# Altium PCB DisplayPCB.PcbDoc (part 1 of 2)
Units mil, origin at the board's own origin, x right, y up, seen from the top; angles counter-clockwise.
Board outline 3900 x 3000 mil, 2 copper layers (Top Layer, Bottom Layer); 68 components, 81 nets, 271 pads, 0 vias.
Unrouted connection lines stored in the file: 162.
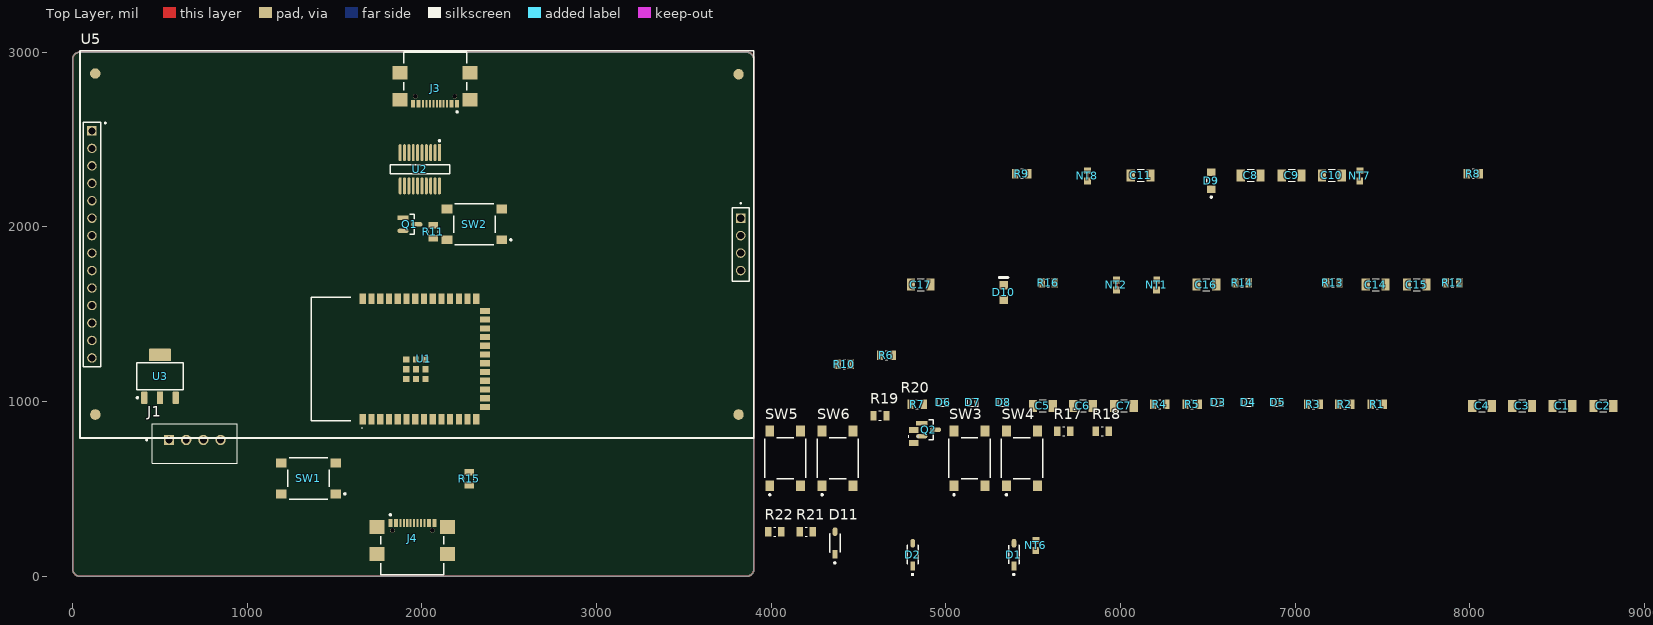
[diagram p0: Top Layer view]
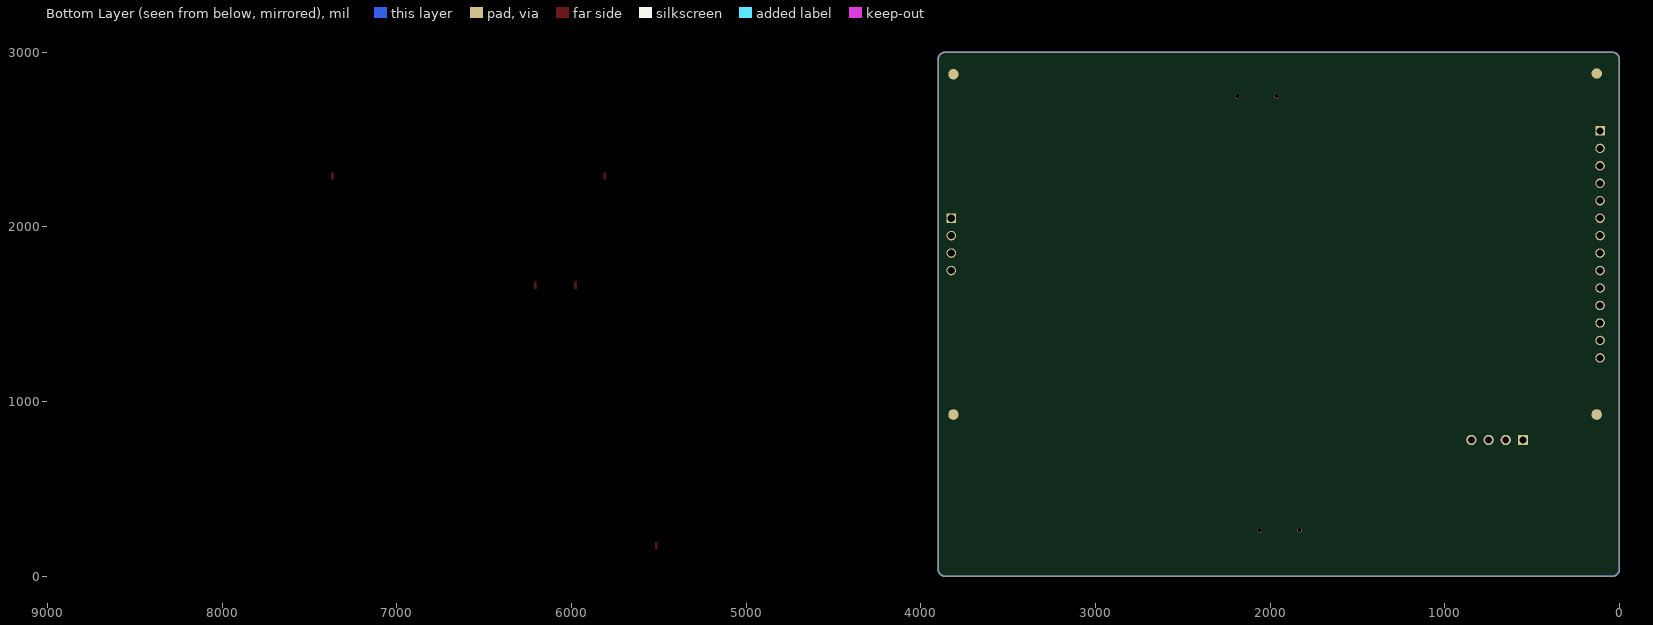
[diagram p1: Bottom Layer view, seen from below]

## Layer stack, top to bottom
Top Solder: solder mask 0.4, Solder Resist, Dk 3.5
Top Layer: signal copper 1.4
Dielectric 1: dielectric 12.6, FR-4, Dk 4.8
Bottom Layer: signal copper 1.4
Bottom Solder: solder mask 0.4, Solder Resist, Dk 3.5

## Board outline
0,40 0,2960 cw(c40,2960) 40,3000 3860,3000 cw(c3860,2960) 3900,2960 3900,40 cw(c3860,40) 3860,0 40,0 cw(c40,40)

## Design rules (kind name [scope] priority, off if disabled: settings)
Clearance [All] p1: gap=10 ignorepadtopadclearanceinfootprint=FALSE
PolygonConnect [All] p1: connectstyle=Relief reliefconductorwidth=10 reliefentries=4 polygonreliefangle="90 Angle" airgapwidth=10
RoutingVias [All] p1: holewidth=28 width=50 viastyle="Through Hole" minholewidth=28 minwidth=50 maxholewidth=28 maxwidth=50
SolderMaskExpansion [All] p1: expansion=4 istentingtop=FALSE
SupplyNets "Schematic Supply Nets_5" [InNet('+VCC')] p1: voltage=0.000
SupplyNets "Schematic Supply Nets_4" [InNet('+5V_VBUS2')] p2: voltage=0.000
SupplyNets "Schematic Supply Nets_3" [InNet('+3V3')] p3: voltage=0.000
SupplyNets "Schematic Supply Nets_1" [InNet('+5V_VBUS1')] p4: voltage=0.000
SupplyNets "Schematic Supply Nets" [InNet('GND')] p5: voltage=0.000
Width [All] p1: maxlimit=10 minlimit=10 preferedwidth=10
30 further rules are at their usual default settings.

## Classes and differential pairs
component class U_Peripherals: R17 R18 R19 R20 SW3 SW4 SW5 SW6 U5

## Components (designator, comment, footprint, x,y, rotation, side; value= is the part's Value field where it differs from the comment)
C1 "100 nF, 50 V" 1206_CAP 8529.68,975 r0 top value=100nF
C2 "4u7, 16V" 1206_CAP 8764.68,975 r0 top value=4.7uF
C3 "10uF, 25 V" 1206_CAP 8299.68,975 r0 top value=10uF
C4 "10uF, 25 V" 1206_CAP 8069.69,975 r0 top value=10uF
C5 "100 nF, 50 V" 1206_CAP 5554.69,975 r0 top value=100nF
C6 "100 nF, 50 V" 1206_CAP 5784.69,975 r0 top value=100nF
C7 "100 nF, 50 V" 1206_CAP 6019.69,975 r0 top value=100nF
C8 "4u7, 16V" 1206_CAP 6744.69,2295 r0 top value=4.7uF
C9 "10uF, 25 V" 1206_CAP 6979.69,2295 r0 top value=10uF
C10 "10uF, 25 V" 1206_CAP 7209.69,2295 r0 top value=10uF
C11 "10uF, 25 V" 1206_CAP 6114.69,2295 r0 top value=10uF
C14 "10uF, 25 V" 1206_CAP 7460.94,1670 r0 top value=10uF
C15 "100 nF, 50 V" 1206_CAP 7695.94,1670 r0 top value=100nF
C16 "1uF, 16 V" 1206_CAP 6490.94,1670 r0 top
C17 "100 nF, 50 V" 1206_CAP 4855.94,1670 r0 top value=100nF
D1 "1N5819HW-7-F" FP-SOD123-IPC_B 5389.69,123.8 r90 top
D2 "1N5819HW-7-F" FP-SOD123-IPC_B 4809.69,123.8 r90 top
D3 "AQ3045-01ETG" SOD882 6559.69,995 r0 top
D4 "AQ3045-01ETG" SOD882 6729.69,995 r0 top
D5 "AQ3045-01ETG" SOD882 6899.69,995 r0 top
D6 "AQ3045-01ETG" SOD882 4984.69,995 r0 top
D7 "AQ3045-01ETG" SOD882 5154.69,995 r0 top
D8 "AQ3045-01ETG" SOD882 5329.69,995 r0 top
D9 "Green LED" FP-LTST-C171KGKT-MFG 6519.69,2265 r90 top
D10 "RED LED" LTST-C170KRKT_V 5330.94,1625 r90 top
D11 "1N5819HW-7-F" FP-SOD123-IPC_B 4365,190 r90 top
J1 "B4B-XH-A" JST_B4B-XH-A(LF)(SN) 699.21,759.33 r180 top
J3 "USB4110-GF-A" FP-USB4110-GF-A-MFG 2075,2850 r180 top
J4 "USB4110-GF-A" FP-USB4110-GF-A-MFG 1945,160 r0 top
NT1 "NT" NetTie_SMD 6205.94,1670 r90 top net-tie
NT2 "NT" NetTie_SMD 5975.94,1670 r90 top net-tie
NT6 "NT" NetTie_SMD 5514.69,178.8 r90 top net-tie
NT7 "NT" NetTie_SMD 7369.69,2295 r90 top net-tie
NT8 "NT" NetTie_SMD 5809.69,2295 r90 top net-tie
Q1 "SS8050-G" FP-SS8050-G-IPC_A 1930.61,2015 r0 top
Q2 "SS8050-G" FP-SS8050-G-IPC_A 4900.94,838.8 r0 top
R1 "27R" 0805_Resistor 7469.69,985 r0 top value=27.4R
R2 "27R" 0805_Resistor 7284.69,985 r0 top value=27.4R
R3 "0R" 0805_Resistor 7104.69,985 r0 top
R4 "5K1" 0805_Resistor 6224.69,985 r0 top value=5.1kR
R5 "5K1" 0805_Resistor 6409.69,985 r0 top value=5.1kR
R6 "5K1" 0805_Resistor 4659.69,1265 r0 top value=5.1kR
R7 "5K1" 0805_Resistor 4834.69,985 r0 top value=5.1kR
R8 "5K1" 0805_Resistor 8019.69,2305 r0 top value=5.1kR
R9 "10k (1%)" 0805_Resistor 5434.69,2305 r0 top
R10 "10k (1%)" 0805_Resistor 4417.4,1215 r0 top
R11 "0R" 0805_Resistor 2065,1972.4 r90 top
R12 "0R" 0805_Resistor 7900.94,1680 r0 top
R13 "10k (1%)" 0805_Resistor 7215.94,1680 r0 top
R14 "1K" 0805_Resistor 6695.94,1680 r0 top value=1kR
R15 "0R" 0805_Resistor 2270,557.4 r90 top
R16 "0R" 0805_Resistor 5585.94,1680 r0 top
R17 "10k (1%)" 0805_Resistor 5675,830 r0 top
R18 "10k (1%)" 0805_Resistor 5895,830 r0 top
R19 "10k (1%)" 0805_Resistor 4622.6,920 r0 top
R20 "10k (1%)" 0805_Resistor 4815,800 r90 top
R21 "1K" 0805_Resistor 4200,255 r0 top value=1kR
R22 "2k" 0805_Resistor 4020,255 r0 top value=2kR
SW1 "PTS645SH50SMTR92 LFS" FP-PTS645SH50SMTR92LFS-MFG 1350,560 r180 top
SW2 "PTS645SH50SMTR92 LFS" FP-PTS645SH50SMTR92LFS-MFG 2300,2015 r180 top
SW3 "PTS645SH50SMTR92 LFS" FP-PTS645SH50SMTR92LFS-MFG 5135,675 r90 top
SW4 "PTS645SH50SMTR92 LFS" FP-PTS645SH50SMTR92LFS-MFG 5435,675 r90 top
SW5 "PTS645SH50SMTR92 LFS" FP-PTS645SH50SMTR92LFS-MFG 4080,675 r90 top
SW6 "PTS645SH50SMTR92 LFS" FP-PTS645SH50SMTR92LFS-MFG 4380,675 r90 top
U1 "ESP32-S3-WROOM-1(N16R8)" ESP32S3WROOM1N8R2 1868.27,1244.17 r90 top
U2 "FT231XS-R" FP-SSOP-20-IPC_A 1987.5,2330.01 r270 top
U3 "TL1963A-33DCYR" DCY0004A_N 500,1145 r90 top
U5 "TFT_SPI_SCREEN" TFT_SCREEN 42,791 r0 top

## Footprints (in the part's own frame and the unit in brackets; to place one, negate y for a bottom-side part, rotate by r counter-clockwise, add the part's x,y. Pads: shape width x height; smd on the part's side, far side on the other; paste and mask are expansions set on the pad)
0805_Resistor [mm]
  rect 0.92x1.38 smd: 1(-0.955,0) 2(0.955,0)
  silkscreen extent -0.17,-0.68 0.17,0.68, body extent -1,-0.63 1,0.63, height 0.6
1206_CAP [mm]
  rect 1.21x1.77 smd: 1(-1.428,0) 2(1.428,0)
  silkscreen extent -0.5,-0.88 0.5,0.88, body extent -1.6,-0.72 1.6,0.88, height 1.8
DCY0004A_N [mm] "SOT223, 4-Leads, Body 6.7x3.7mm, Pitch 2.3mm, IPC Medium Density"
  rrect11% 1.75x0.9 smd: 1(-3.125,2.3) 2(-3.125,0) 3(-3.125,-2.3)
  rrect6% 1.75x3.2 smd: 4(3.125,0)
  silkscreen extent -3.25,-3.35 1.95,3.42, body extent -3.5,-3.25 3.5,3.25, height 1.62
ESP32S3WROOM1N8R2 [mm]
  rect 1.5x0.9 smd: 1(-8.75,5.26) 2(-8.75,3.99) 3(-8.75,2.72) 4(-8.75,1.45) 5(-8.75,0.18) 6(-8.75,-1.09) 7(-8.75,-2.36) 8(-8.75,-3.63) 9(-8.75,-4.9) 10(-8.75,-6.17) 11(-8.75,-7.44) 12(-8.75,-8.71) 13(-8.75,-9.98) 14(-8.75,-11.25) 27(8.75,-11.25) 28(8.75,-9.98) 29(8.75,-8.71) 30(8.75,-7.44) 31(8.75,-6.17) 32(8.75,-4.9) 33(8.75,-3.63) 34(8.75,-2.36) 35(8.75,-1.09) 36(8.75,0.18) 37(8.75,1.45) 38(8.75,2.72) 39(8.75,3.99) 40(8.75,5.26)
  rect 0.9x1.5 smd: 15(-6.985,-12.5) 16(-5.715,-12.5) 17(-4.445,-12.5) 18(-3.175,-12.5) 19(-1.905,-12.5) 20(-0.635,-12.5) 21(0.635,-12.5) 22(1.905,-12.5) 23(3.175,-12.5) 24(4.445,-12.5) 25(5.715,-12.5) 26(6.985,-12.5)
  rect 0.9x0.9 smd: 41(-1.5,-2.46) 42(-1.5,-1.06) 43(-2.9,-1.06) 44(-2.9,-2.46) 45(-2.9,-3.86) 46(-1.5,-3.86) 47(-0.1,-3.86) 48(-0.1,-2.46) 49(-0.1,-1.06)
  silkscreen extent -10.1,5.35 9,12.75, body extent -9,-12.75 9,12.75, height 3.25
FP-LTST-C171KGKT-MFG [mm]
  rect 1.1x1.25 smd paste+0 mask+0: 1(-1.25,0) 2(1.25,0)
  silkscreen extent -2.52,-0.67 0.33,0.67, body extent -1.9,-0.77 1.9,0.77, height 0.25
FP-PTS645SH50SMTR92LFS-MFG [mm]
  rect 1.55x1.3 smd paste+0 mask+0: 1(-3.975,2.25) 2(3.975,2.25) 3(-3.975,-2.25) 4(3.975,-2.25)
  silkscreen extent -5.43,-3 3,3, body extent -4.5,-3 4.5,3, height 4.3
FP-SOD123-IPC_B [mil]
  rect 49.51x27.66 smd paste+0 mask+0: 1(-64.98,0)
  rrect100% 49.51x27.66 smd paste+0 mask+0: 2(64.98,0)
  silkscreen extent -119,-31 52,31, body extent -100,-40 100,40, height 10
FP-SS8050-G-IPC_A [mm]
  rect 1.657x0.612 smd paste+0 mask+0: 1(-1.001,0.95)
  rrect100% 1.657x0.612 smd paste+0 mask+0: 2(-1.001,-0.95) 3(1.001,0)
  silkscreen extent 0,-1.45 0.65,1.45, body extent -2.33,-1.95 2.33,1.95, height 0.25
FP-SSOP-20-IPC_A [mil]
  rect 97.53x16.81 smd paste+0 mask+0: 1(-95.01,112.5)
  rrect100% 97.53x16.81 smd paste+0 mask+0: 2(-95.01,87.5) 3(-95.01,62.5) 4(-95.01,37.5) 5(-95.01,12.5) 6(-95.01,-12.5) 7(-95.01,-37.5) 8(-95.01,-62.5) 9(-95.01,-87.5) 10(-95.01,-112.5) 11(95.01,-112.5) 12(95.01,-87.5) 13(95.01,-62.5) 14(95.01,-37.5) 15(95.01,-12.5) 16(95.01,12.5) 17(95.01,37.5) 18(95.01,62.5) 19(95.01,87.5) 20(95.01,112.5)
  silkscreen extent -168,-170 27,170, body extent -163,-190 163,190, height 10
FP-USB4110-GF-A-MFG [mm]
  rect 2.18x2 smd paste+0 mask+0: 1(-5.11,3.105) 2(5.11,3.105) 3(-5.11,-0.825) 4(5.11,-0.825)
  rect 0.6x1.15 smd paste+0 mask+0: A1-B12(-3.2,3.68) A4-B9(-2.4,3.68) B1-A12(3.2,3.68) B4-A9(2.4,3.68)
  rect 0.3x1.15 smd paste+0 mask+0: A5(-1.25,3.68) A6(-0.25,3.68) A7(0.25,3.68) A8(1.25,3.68) B5(1.75,3.68) B6(0.75,3.68) B7(-0.75,3.68) B8(-1.75,3.68)
  round 0.65 hole 0.65 unplated paste-2539.97 mask+0: ""(-2.89,2.605) ""(2.89,2.605)
  silkscreen extent -4.57,-3.83 4.57,4.99, body extent -6.3,-3.92 6.3,4.36, height 0.25
JST_B4B-XH-A(LF)(SN) [mm]
  rect 1.508x1.508 / inner round 1.508 / far side rect 1.508x1.508 hole 1: 1(3.75,-0.525)
  round 1.508 hole 1: 2(1.25,-0.525) 3(-1.25,-0.525) 4(-3.75,-0.525)
  silkscreen extent -6.2,-2.88 7.1,2.88, body extent -6.2,-2.88 6.2,2.88, height 3.4
LTST-C170KRKT_V [mm] "SMD, 2-Leads, Body 2x1.25mm"
  rect 1.2x1.2 smd: 1(-1.05,0) 2(1.05,0)
  silkscreen extent -0.05,-0.63 2.16,0.64, body extent -1.01,-0.63 1.01,0.63, height 1.1
NetTie_SMD [mm]
  rect 1x1 smd mask-10: 1(-0.813,0) 2(0.686,-0.025)
  Top Layer region: -0.609,-0.203 0.458,-0.203 0.458,0.178 -0.609,0.178
SOD882 [mm]
  rect 0.35x0.6 smd: 1(-0.325,0) 2(0.325,0)
  silkscreen extent -0.79,-0.58 0.79,0.58, body extent -0.54,-0.34 0.54,0.34, height 0.42
TFT_SCREEN [mm] "3.5 TFT LCD"
  rect 1.37x1.37 hole 1.02: 01(1.727,44.679)
  round 1.37 hole 1.02: 02(1.727,42.139) 03(1.727,39.599) 04(1.727,37.059) 05(1.727,34.519) 06(1.727,31.979) 07(1.727,29.439) 08(1.727,26.899) 09(1.727,24.359) 10(1.727,21.819) 11(1.727,19.279) 12(1.727,16.739) 13(1.727,14.199) 14(1.727,11.659)
  oval 1.55x1.5 all layers, no hole: 3(2.22,53.02)
  oval 1.5x1.55 all layers, no hole: 6(2.22,3.42) 7(95.78,3.42) 8(95.78,52.92)
  rect 1.39x1.39 hole 1.04: 15(96.088,31.979)
  round 1.39 hole 1.04: 16(96.088,29.439) 17(96.088,26.899) 18(96.088,24.359)
  silkscreen extent 0,0 98,56.34, body extent 0,0 98,56.5, height 17.94

## Part data
C1 C5 C6 C7 C15 C17: library part 1206B104K500CT, "Ceramic Capacitor, Multilayer, Ceramic, 50V, 10% +Tol, 10% -Tol, X7R, 15% TC, 0.1uF, Surface Mount, 1206", Capacitor Type=Ceramic, Case/Package=1206, Manufacturer="Walsin Technologies", Max Operating Temperature=125°C, Min Operating Temperature=-55°C, Package Shape=Rectangular, Package Style=SMTMeter, Rated DC Voltage (URdc)=50V, Supplier Part Number=1292-1605-1-ND, Temperature Characteristics Code=X7R, Tolerance  (fill in as +-)=10%, Category="Ceramic Capacitors", ComponentLink1Description=https://datasheet.ciiva.com:443/pdfs/VipMasterIC/IC/WATC/WATC-S-A0009550342/WATC-S-A0009550342-1.pdf?src-supplier=IHS+Markit, ComponentLink1URL=https://datasheet.ciiva.com:443/pdfs/VipMasterIC/IC/WATC/WATC-S-A0009550342/WATC-S-A0009550342-1.pdf?src-supplier=IHS+Markit, ComponentLink2Description=http://www.farnell.com/datasheets/2340522.pdf?src-supplier=Farnell, ComponentLink2URL=http://www.farnell.com/datasheets/2340522.pdf?src-supplier=Farnell, ComponentLink3Description=http://www.farnell.com/datasheets/2340522.pdf?src-supplier=Newark, ComponentLink3URL=http://www.farnell.com/datasheets/2340522.pdf?src-supplier=Newark, ComponentLink4Description=http://www.passivecomponent.com/wp-content/uploads/2018/10/MLCC.pdf?src-supplier=Digikey, ComponentLink4URL=http://www.passivecomponent.com/wp-content/uploads/2018/10/MLCC.pdf?src-supplier=Digikey, ComponentLink5Description=https://datasheet.octopart.com/1206B104K500CT-Walsin-Technologies-datasheet-85392065.pdf?src-supplier=Element14, ComponentLink5URL=https://datasheet.octopart.com/1206B104K500CT-Walsin-Technologies-datasheet-85392065.pdf?src-supplier=Element14, ComponentLink6Description=http://www.farnell.com/datasheets/1958513.pdf?src-supplier=Element14, ComponentLink6URL=http://www.farnell.com/datasheets/1958513.pdf?src-supplier=Element14, ComponentLink7Description=http://www.farnell.com/datasheets/2340522.pdf?src-supplier=Element14, ComponentLink7URL=http://www.farnell.com/datasheets/2340522.pdf?src-supplier=Element14, ComponentLink8Description=https://www.verical.com/server-webapp/html/getDatasheet?partID=71573&src-supplier=Verical, ComponentLink8URL=https://www.verical.com/server-webapp/html/getDatasheet?partID=71573&src-supplier=Verical, ComponentLink9Description=https://datasheet.octopart.com/1206B104K500CT-Walsin-Technologies-datasheet-128065749.pdf?src-supplier=Future+Electronics, ComponentLink9URL=https://datasheet.octopart.com/1206B104K500CT-Walsin-Technologies-datasheet-128065749.pdf?src-supplier=Future+Electronics, ComponentLink10Description=https://datasheet.octopart.com/1206B104K500CT-Walsin-Technologies-datasheet-62066062.pdf?src-supplier=TME, ComponentLink10URL=https://datasheet.octopart.com/1206B104K500CT-Walsin-Technologies-datasheet-62066062.pdf?src-supplier=TME, Dielectric Material=Ceramic, Height=0.8mm, JESD-609 Code=e3, Length=3.2mm, Manufacturer Part Number=1206B104K500CT, Mounting Technology="Surface Mount", Multilayer=Yes, Packaging="Tape and Reel", Pins=2, Pricing="1=0.11, 10=0.061, 100=0.0383, 1000=0.02628 (USD)", Reach SVHC Compliant=Yes, RoHS=Yes, RoHS Compliant=Yes, Stock=1578618, Supplier=Digikey, Terminal Finish=Nickel, Termination=Wraparound, Tolerance (fill in as +-)=10%, Width=1.6mm
C2 C8: library part CL31B475KOHNNNE, "CAP CER 4.7UF 16V X7R 1206", Capacitor Type=Ceramic, Case/Package=1206, Manufacturer=Samsung, Max Operating Temperature=125°C, Min Operating Temperature=-55°C, Package Shape=Rectangular, Package Style=SMTMeter, Rated DC Voltage (URdc)=16V, Supplier Part Number=1276-3182-1-ND, Temperature Characteristics Code=X7R, Tolerance  (fill in as +-)=10%, Category="Ceramic Capacitors", ComponentLink1Description=https://datasheet.ciiva.com:443/pdfs/VipMasterIC/IC/SEMS/SEMS-S-A0008522756/SEMS-S-A0008522608-1.pdf?src-supplier=IHS+Markit, ComponentLink1URL=https://datasheet.ciiva.com:443/pdfs/VipMasterIC/IC/SEMS/SEMS-S-A0008522756/SEMS-S-A0008522608-1.pdf?src-supplier=IHS+Markit, ComponentLink2Description=https://datasheet.ciiva.com/15196/getdatasheetpartid-358695-15196064.pdf?src-supplier=Verical, ComponentLink2URL=https://datasheet.ciiva.com/15196/getdatasheetpartid-358695-15196064.pdf?src-supplier=Verical, Dielectric Material=Ceramic, Height=1.8mm, JESD-609 Code=e3, Length=3.2mm, Manufacturer Part Number=CL31B475KOHNNNE, Mounting Technology="Surface Mount", Multilayer=Yes, Packaging="Tape and Reel", Pins=2, Pricing="1=0.18, 10=0.103, 100=0.0669, 1000=0.04704 (USD)", Reach SVHC Compliant=Yes, RoHS=Yes, RoHS Compliant=Yes, Stock=236847, Supplier=Digikey, Terminal Finish=Nickel, Termination=Wraparound, Tolerance (fill in as +-)=10%, Width=1.6mm
C3 C4 C9 C10 C11 C14: library part TMK316BJ106KL-T, "Ceramic Capacitor, Multilayer, Ceramic, 25V, 10% +Tol, 10% -Tol, X5R, 15% TC, 10uF, Surface Mount, 1206", Capacitor Type=Ceramic, Case/Package=1206, Manufacturer="Taiyo Yuden", Max Operating Temperature=85°C, Min Operating Temperature=-55°C, Package Shape=Rectangular, Package Style=SMTMeter, Rated DC Voltage (URdc)=25V, Supplier Part Number=587-1337-1-ND, Temperature Characteristics Code=X5R, Tolerance  (fill in as +-)=10%, Category="Ceramic Capacitors", ComponentLink1Description=https://datasheet.ciiva.com:443/pdfs/VipMasterIC/IC/TAIY/TAIY-S-A0007939172/TAIY-S-A0007939042-1.pdf?src-supplier=IHS+Markit, ComponentLink1URL=https://datasheet.ciiva.com:443/pdfs/VipMasterIC/IC/TAIY/TAIY-S-A0007939172/TAIY-S-A0007939042-1.pdf?src-supplier=IHS+Markit, ComponentLink2Description=https://datasheet.ciiva.com/7975/1734574-7975841.pdf?src-supplier=Element14, ComponentLink2URL=https://datasheet.ciiva.com/7975/1734574-7975841.pdf?src-supplier=Element14, ComponentLink3Description=https://datasheet.ciiva.com/26936/getdatasheetpartid-782930-26936474.pdf?src-supplier=Verical, ComponentLink3URL=https://datasheet.ciiva.com/26936/getdatasheetpartid-782930-26936474.pdf?src-supplier=Verical, ComponentLink4Description=https://datasheet.ciiva.com/30053/584tmk316bj106kl-t-30053522.pdf?src-supplier=Onlinecomponents.com, ComponentLink4URL=https://datasheet.ciiva.com/30053/584tmk316bj106kl-t-30053522.pdf?src-supplier=Onlinecomponents.com, ComponentLink5Description=https://datasheet.ciiva.com/11601/tmk316bj106kl-t-ss-11601880.pdf?src-supplier=Avnet, ComponentLink5URL=https://datasheet.ciiva.com/11601/tmk316bj106kl-t-ss-11601880.pdf?src-supplier=Avnet, ComponentLink6Description=https://datasheet.ciiva.com/15922/1116tmk316bj106kl-t-15922414.pdf?src-supplier=Onlinecomponents.com, ComponentLink6URL=https://datasheet.ciiva.com/15922/1116tmk316bj106kl-t-15922414.pdf?src-supplier=Onlinecomponents.com, ComponentLink7Description=https://datasheet.ciiva.com/5420/mlcc-all-e-541559-5420143.pdf?src-supplier=Mouser, ComponentLink7URL=https://datasheet.ciiva.com/5420/mlcc-all-e-541559-5420143.pdf?src-supplier=Mouser, Dielectric Material=Ceramic, Height=1.6mm, JESD-609 Code=e3, Length=3.2mm, Manufacturer Part Number=TMK316BJ106KL-T, Mounting Technology="Surface Mount", Multilayer=Yes, Packaging="Tape and Reel", Pins=2, Pricing="1=0.12, 10=0.046, 100=0.04, 1000=0.03425 (USD)", Reach SVHC Compliant=Yes, RoHS=Yes, RoHS Compliant=Yes, Stock=22102, Supplier=Digikey, Terminal Finish=Nickel, Termination=Wraparound, Tolerance (fill in as +-)=10%, Width=1.6mm
C16: library part CL31B105KOFNNNE, "Ceramic Capacitor, Multilayer, Ceramic, 16V, 10% +Tol, 10% -Tol, X7R, 15% TC, 1uF, Surface Mount, 1206", Capacitance=1uF, Capacitor Type=Ceramic, Manufacturer 1=Samsung, Max Operating Temperature=125°C, Min Operating Temperature=-55°C, Negative Tolerance=10%, Package Shape=Rectangular, Package Style=SMTMeter, Rated DC Voltage (URdc)=16V, Temperature Characteristics Code=X7R, Category="Ceramic Capacitors", ComponentLink1Description=https://datasheet.ciiva.com:443/pdfs/VipMasterIC/IC/SEMS/SEMS-S-A0008524868/SEMS-S-A0008524880-1.pdf?src-supplier=IHS+Markit, ComponentLink1URL=https://datasheet.ciiva.com:443/pdfs/VipMasterIC/IC/SEMS/SEMS-S-A0008524868/SEMS-S-A0008524880-1.pdf?src-supplier=IHS+Markit, ComponentLink2Description=https://datasheet.ciiva.com/25798/cl31b105kofnnne-25798673.pdf?src-supplier=Digikey, ComponentLink2URL=https://datasheet.ciiva.com/25798/cl31b105kofnnne-25798673.pdf?src-supplier=Digikey, ComponentLink3Description=https://datasheet.ciiva.com/26838/getdatasheetpartid-358370-26838906.pdf?src-supplier=Verical, ComponentLink3URL=https://datasheet.ciiva.com/26838/getdatasheetpartid-358370-26838906.pdf?src-supplier=Verical, ComponentLink4Description=https://datasheet.ciiva.com/29200/453334-da-01-en-vs-kondensator-1206-29200316.pdf?src-supplier=Conrad, ComponentLink4URL=https://datasheet.ciiva.com/29200/453334-da-01-en-vs-kondensator-1206-29200316.pdf?src-supplier=Conrad, ComponentLink5Description=https://datasheet.ciiva.com/26310/mlcc-catalogdownload2013-eng-26310089.pdf?src-supplier=Distrelec, ComponentLink5URL=https://datasheet.ciiva.com/26310/mlcc-catalogdownload2013-eng-26310089.pdf?src-supplier=Distrelec, Dielectric Material=Ceramic, Height=1.25mm, JESD-609 Code=e3, Length=3.2mm, Manufacturer Part Number 1=CL31B105KOFNNNE, Mount="Surface Mount", Multilayer=Yes, Number of Pins=2, Packaging="Tape and Reel", Positive Tolerance=10%, Pricing 1="1=0.11, 10=0.059, 100=0.037, 1000=0.02531 (USD)", Reach SVHC Compliant=Yes, RoHS=Yes, RoHS Compliant=Yes, Size Code=1206, Stock 1=16372, Supplier 1=Digikey, Terminal Finish=Nickel, Termination=Wraparound, Width=1.6mm
D1 D2 D11: "Rectifier Diode, Schottky, 1 Phase, 1 Element, 1A, 40V V(RRM), Silicon", Forward Voltage=320mV, Manufacturer=Diodes, Max Operating Temperature=125°C, Max Output current=1A, Max Power Dissipation=450mW, Min Operating Temperature=-65°C, Non-rep Pk Forward Current-Max=25A, Package Body Material=Plastic, Package Shape=Rectangular, Package Style="SMALL OUTLINEMeter", Peak Reflow Temperature (Cel)=260°C, Rep Pk Reverse Voltage-Max=40V, Supplier Part Number=1N5819HW-FDICT-ND, Time @ Peak Reflow Temperature-Max (s)=40s, Category="Rectifier Diodes", ComponentLink1Description=https://datasheet.ciiva.com:443/pdfs/VipMasterIC/IC/DIOD/DIOD-S-A0009689747/DIOD-S-A0009691035-1.pdf?src-supplier=IHS+Markit, ComponentLink1URL=https://datasheet.ciiva.com:443/pdfs/VipMasterIC/IC/DIOD/DIOD-S-A0009689747/DIOD-S-A0009691035-1.pdf?src-supplier=IHS+Markit, ComponentLink2Description=https://datasheet.ciiva.com/16303/ds30217-16303296.pdf?src-supplier=Future+Electronics, ComponentLink2URL=https://datasheet.ciiva.com/16303/ds30217-16303296.pdf?src-supplier=Future+Electronics, ComponentLink3Description=https://datasheet.ciiva.com/1177/ds30217-1177089.pdf?src-supplier=Element14, ComponentLink3URL=https://datasheet.ciiva.com/1177/ds30217-1177089.pdf?src-supplier=Element14, ComponentLink4Description=https://datasheet.ciiva.com/912/ds30217-912801.pdf?src-supplier=Digikey, ComponentLink4URL=https://datasheet.ciiva.com/912/ds30217-912801.pdf?src-supplier=Digikey, ComponentLink5Description=https://datasheet.ciiva.com/912/ds30217-912802.pdf?src-supplier=Digikey, ComponentLink5URL=https://datasheet.ciiva.com/912/ds30217-912802.pdf?src-supplier=Digikey, ComponentLink6Description=https://datasheet.ciiva.com/912/ds30217-912803.pdf?src-supplier=Digikey, ComponentLink6URL=https://datasheet.ciiva.com/912/ds30217-912803.pdf?src-supplier=Digikey, ComponentLink7Description=https://datasheet.ciiva.com/8303/ds30217-8303132.pdf?src-supplier=Avnet, ComponentLink7URL=https://datasheet.ciiva.com/8303/ds30217-8303132.pdf?src-supplier=Avnet, Diode Element Material=SILICON, Diode Type=RECTIFIER, JESD-30 Code=R-PDSO-G2, JESD-609 Code=e3, Manufacturer Part Number=1N5819HW-7-F, Moisture Sensitivity Level=1, Number of Elements=1, Pins=2, Pricing="1=0.25, 10=0.17, 100=0.1037, 500=0.09142, 1000=0.08553 (USD)", Qualification Status="Not Qualified", Reach SVHC Compliant=Yes, RoHS=Yes, RoHS Compliant=Yes, Stock=568095, Supplier=Digikey, Surface Mount=Yes, Technology=SCHOTTKY, Terminal Finish=Tin, Terminal Form="Gull Wing", Terminal Position=DUAL
D3 D4 D5 D6 D7 D8: "Trans Voltage Suppressor Diode, 40W, 5.3V V(RWM), Bidirectional, 1 Element, Silicon, MO-236 / TVS DIODE 5.3VWM 12VC SOD882", Manufacturer 1=Littelfuse, Max Breakdown Voltage=9V, Max Operating Temperature=150°C, Min Breakdown Voltage=6.8V, Min Operating Temperature=-55°C, Non-rep Peak Rev Power Dis-Max=40W, Package Body Material=Plastic, Package Shape=Rectangular, Package Style="CHIP CARRIERMeter", Rep Pk Reverse Voltage-Max=5.3V, Category="TVS Diodes", ComponentLink1Description=https://datasheet.ciiva.com:443/pdfs/VipMasterIC/IC/LFSI/LFSI-S-A0007892042/LFSI-S-A0007892042-1.pdf?src-supplier=IHS+Markit, ComponentLink1URL=https://datasheet.ciiva.com:443/pdfs/VipMasterIC/IC/LFSI/LFSI-S-A0007892042/LFSI-S-A0007892042-1.pdf?src-supplier=IHS+Markit, ComponentLink2Description=http://www.littelfuse.com/~/media/electronics/datasheets/tvs_diode_arrays/littelfuse_tvs_diode_array_aq3045_datasheet.pdf.pdf?src-supplier=Digikey, ComponentLink2URL=http://www.littelfuse.com/~/media/electronics/datasheets/tvs_diode_arrays/littelfuse_tvs_diode_array_aq3045_datasheet.pdf.pdf?src-supplier=Digikey, ComponentLink3Description=https://www.littelfuse.com/~/media/electronics/datasheets/tvs_diode_arrays/littelfuse_tvs_diode_array_aq3045_datasheet.pdf.pdf?src-supplier=Digikey, ComponentLink3URL=https://www.littelfuse.com/~/media/electronics/datasheets/tvs_diode_arrays/littelfuse_tvs_diode_array_aq3045_datasheet.pdf.pdf?src-supplier=Digikey, ComponentLink4Description=https://datasheet.octopart.com/AQ3045-01ETG-Littelfuse-datasheet-101609968.pdf?src-supplier=Farnell, ComponentLink4URL=https://datasheet.octopart.com/AQ3045-01ETG-Littelfuse-datasheet-101609968.pdf?src-supplier=Farnell, ComponentLink5Description=https://datasheet.octopart.com/AQ3045-01ETG-Littelfuse-datasheet-140480283.pdf?src-supplier=Future+Electronics, ComponentLink5URL=https://datasheet.octopart.com/AQ3045-01ETG-Littelfuse-datasheet-140480283.pdf?src-supplier=Future+Electronics, Diode Element Material=SILICON, Diode Type="TRANS VOLTAGE SUPPRESSOR", Manufacturer Part Number 1=AQ3045-01ETG, Number of Elements=1, Number of Pins=2, Polarity=Bidirectional, Pricing 1="1=0.46, 10=0.302, 100=0.141, 500=0.134, 1000=0.127, 2000=0.1255, 5000=0.124, 10000=0.111, 20000=0.10638 (USD)", Reach SVHC Compliant=Yes, Reference Standard=AEC-Q101, RoHS=Yes, RoHS Compliant=Yes, Stock 1=14379, Supplier 1=Digikey, Surface Mount=Yes, Technology=AVALANCHE, Terminal Form="No Lead", Terminal Position=BOTTOM
D9: library part LTST-C171KGKT, "Green 571nm LED Indication - Discrete 2V 0805 (2012 Metric)", Color=Green, Forward Current=30mA, Manufacturer="Vishay Lite-On", Max Operating Temperature=85°C, Min Operating Temperature=-55°C, Supplier Part Number=160-1426-1-ND, Channels=1, ComponentLink1Description=https://datasheet.ciiva.com:443/pdfs/VipMasterIC/IC/LITE/LITES11816/LITES11816-1.pdf?src-supplier=IHS+Markit, ComponentLink1URL=https://datasheet.ciiva.com:443/pdfs/VipMasterIC/IC/LITE/LITES11816/LITES11816-1.pdf?src-supplier=IHS+Markit, ComponentLink2Description=https://datasheet.ciiva.com/11774/0900766b80dc0298-11774377.pdf?src-supplier=Rs, ComponentLink2URL=https://datasheet.ciiva.com/11774/0900766b80dc0298-11774377.pdf?src-supplier=Rs, ComponentLink3Description=https://datasheet.ciiva.com/12400/lite-on-ltst-c171kgkt-187692-12400799.pdf?src-supplier=Mouser, ComponentLink3URL=https://datasheet.ciiva.com/12400/lite-on-ltst-c171kgkt-187692-12400799.pdf?src-supplier=Mouser, ComponentLink4Description=https://datasheet.ciiva.com/16200/lite-on20ltst-c171kgkt-16200100.pdf?src-supplier=Future+Electronics, ComponentLink4URL=https://datasheet.ciiva.com/16200/lite-on20ltst-c171kgkt-16200100.pdf?src-supplier=Future+Electronics, ComponentLink5Description=https://datasheet.ciiva.com/15118/getdatasheetpartid-214542-15118099.pdf?src-supplier=Verical, ComponentLink5URL=https://datasheet.ciiva.com/15118/getdatasheetpartid-214542-15118099.pdf?src-supplier=Verical, ComponentLink6Description=https://datasheet.ciiva.com/2110/s-110-ltst-c171kgkt-2110072.pdf?src-supplier=Digikey, ComponentLink6URL=https://datasheet.ciiva.com/2110/s-110-ltst-c171kgkt-2110072.pdf?src-supplier=Digikey, ComponentLink7Description=https://datasheet.ciiva.com/2110/s-110-ltst-c171kgkt-2110073.pdf?src-supplier=Digikey, ComponentLink7URL=https://datasheet.ciiva.com/2110/s-110-ltst-c171kgkt-2110073.pdf?src-supplier=Digikey, ComponentLink8Description=https://datasheet.ciiva.com/2110/s-110-ltst-c171kgkt-2110074.pdf?src-supplier=Digikey, ComponentLink8URL=https://datasheet.ciiva.com/2110/s-110-ltst-c171kgkt-2110074.pdf?src-supplier=Digikey, JESD-609 Code=e3, Lens Style="WATER CLEAR", Luminous Intensity-Nom=35mcd, Manufacturer Part Number=LTST-C171KGKT, Mounting Technology="Surface Mount", Optoelectronic Device Type="SINGLE COLOR LED", Overall Height=0.8mm, Packaging="Tape and Reel", Pins=2, Pricing="1=0.15, 10=0.105, 100=0.0723, 500=0.05736, 1000=0.05238 (USD)", Reach SVHC Compliant=Yes, RoHS=Yes, RoHS Compliant=Yes, Shape=Rectangular, Size=1.4mm, Stock=117516, Supplier=Digikey, Terminal Finish=Tin, Terminal Pitch=2.5mm, Viewing Angle=130°
D10: library part LTST-C171KRKT, "Red 631nm LED Indication - Discrete 2V 0805 (2012 Metric)", Color=Red, Forward Current=30mA, Manufacturer="Vishay Lite-On", Max Operating Temperature=85°C, Min Operating Temperature=-55°C, Supplier Part Number=160-1427-1-ND, Supplier Part Number 1=160-1415-1-ND, Category=LEDs, Channels=1, ComponentLink1Description=https://datasheet.ciiva.com:443/pdfs/VipMasterIC/IC/LITE/LITES11817/LITES11817-1.pdf?src-supplier=IHS+Markit, ComponentLink1URL=https://datasheet.ciiva.com:443/pdfs/VipMasterIC/IC/LITE/LITES11817/LITES11817-1.pdf?src-supplier=IHS+Markit, ComponentLink2Description=https://datasheet.ciiva.com/11775/0900766b80dc0299-11775643.pdf?src-supplier=Rs, ComponentLink2URL=https://datasheet.ciiva.com/11775/0900766b80dc0299-11775643.pdf?src-supplier=Rs, ComponentLink3Description=https://datasheet.ciiva.com/12403/lite-on-ltst-c171krkt-187201-12403781.pdf?src-supplier=Mouser, ComponentLink3URL=https://datasheet.ciiva.com/12403/lite-on-ltst-c171krkt-187201-12403781.pdf?src-supplier=Mouser, ComponentLink4Description=https://datasheet.ciiva.com/16444/lite-on20ltst-c171krkt-16444779.pdf?src-supplier=Future+Electronics, ComponentLink4URL=https://datasheet.ciiva.com/16444/lite-on20ltst-c171krkt-16444779.pdf?src-supplier=Future+Electronics, ComponentLink5Description=https://datasheet.ciiva.com/2110/s-110-ltst-c171krkt-2110066.pdf?src-supplier=Digikey, ComponentLink5URL=https://datasheet.ciiva.com/2110/s-110-ltst-c171krkt-2110066.pdf?src-supplier=Digikey, ComponentLink6Description=https://datasheet.ciiva.com/2110/s-110-ltst-c171krkt-2110067.pdf?src-supplier=Digikey, ComponentLink6URL=https://datasheet.ciiva.com/2110/s-110-ltst-c171krkt-2110067.pdf?src-supplier=Digikey, ComponentLink7Description=https://datasheet.ciiva.com/2110/s-110-ltst-c171krkt-2110068.pdf?src-supplier=Digikey, ComponentLink7URL=https://datasheet.ciiva.com/2110/s-110-ltst-c171krkt-2110068.pdf?src-supplier=Digikey, JESD-609 Code=e3, Lens Style="WATER CLEAR", Luminous Intensity-Nom=54mcd, Manufacturer Part Number=LTST-C171KRKT, Mounting Technology="Surface Mount", Optoelectronic Device Type="SINGLE COLOR LED", Overall Height=0.8mm, Packaging="Tape and Reel", Pins=2, Pricing="1=0.15, 10=0.105, 100=0.0723, 500=0.05736, 1000=0.05238 (USD)", Reach SVHC Compliant=Yes, RoHS=Yes, RoHS Compliant=Yes, Shape=Rectangular, Size=1.4mm, Stock=198518, Supplier=Digikey, Supplier 1=Digikey, Terminal Finish=Tin, Terminal Pitch=2.5mm, Viewing Angle=130°
J1: library part 455-B4B-XH-A-ND, "CONN HEADER VERT 4POS 2.5MM", Manufacturer=JST, Manufacturer Part Number=S4B-PH-K-S, Supplier Part Number=455-1721-ND, Category="Headers and Wire Housings", ComponentLink1Description=https://media.digikey.com/pdf/Data%20Sheets/JST%20PDFs/PH%20Series.pdf?src-supplier=Digikey, ComponentLink1URL=https://media.digikey.com/pdf/Data%20Sheets/JST%20PDFs/PH%20Series.pdf?src-supplier=Digikey, Pricing="1=0.19, 10=0.158, 100=0.134, 500=0.1196, 1000=0.11389, 5000=0.10165, 10000=0.09679 (USD)", RoHS=Yes, Stock=152539, Supplier=Digikey, Supplier 1=Digikey, Supplier Part Number 1=455-B4B-XH-A-ND
J3 J4: "USB-C (USB TYPE-C) USB 2.0 Receptacle Connector 24 (16+8 Dummy) Position Surface Mount, Right Angle", Manufacturer 1="Global Connector Technology", Category="USB Connectors", ComponentLink1Description=https://datasheet.octopart.com/USB4110-GF-A-Global-Connector-Technology-datasheet-179886649.pdf?src-supplier=Future+Electronics, ComponentLink1URL=https://datasheet.octopart.com/USB4110-GF-A-Global-Connector-Technology-datasheet-179886649.pdf?src-supplier=Future+Electronics, ComponentLink2Description=https://gct.co/files/drawings/usb4110.pdf?src-supplier=Digikey, ComponentLink2URL=https://gct.co/files/drawings/usb4110.pdf?src-supplier=Digikey, ComponentLink3Description=https://datasheet.octopart.com/USB4110-GF-A-GCT-datasheet-166929324.pdf?src-supplier=SOS+electronic, ComponentLink3URL=https://datasheet.octopart.com/USB4110-GF-A-GCT-datasheet-166929324.pdf?src-supplier=SOS+electronic, ComponentLink4Description=https://datasheet.octopart.com/USB4110-GF-A-GCT-datasheet-166933377.pdf?src-supplier=TME, ComponentLink4URL=https://datasheet.octopart.com/USB4110-GF-A-GCT-datasheet-166933377.pdf?src-supplier=TME, Manufacturer Part Number 1=USB4110-GF-A, Pricing 1="1=1.24, 10=1.006, 25=0.9276, 50=0.8722, 100=0.8201, 250=0.75604, 500=0.71098 (USD)", RoHS=No, Stock 1=16644, Supplier 1=Digikey
NT1 NT2 NT6 NT7 NT8: library part NetTie_SMD, "Net TIE SMD"
Q1 Q2: "Bipolar (BJT) Transistor NPN 25 V 1.5 A 100MHz 300 mW Surface Mount SOT-23-3", Manufacturer=Comchip, Supplier Part Number=641-1790-1-ND, Category=Transistors, ComponentLink1Description=https://datasheet.ciiva.com:443/pdfs/VipMasterIC/IC/COMC/COMC-S-A0004994192/COMC-S-A0004994192-1.pdf?src-supplier=IHS+Markit, ComponentLink1URL=https://datasheet.ciiva.com:443/pdfs/VipMasterIC/IC/COMC/COMC-S-A0004994192/COMC-S-A0004994192-1.pdf?src-supplier=IHS+Markit, ComponentLink2Description="http://www.comchiptech.com/admin/files/product/SS8050-G RevA181526.pdf?src-supplier=Digikey", ComponentLink2URL="http://www.comchiptech.com/admin/files/product/SS8050-G RevA181526.pdf?src-supplier=Digikey", Manufacturer Part Number=SS8050-G, Pricing="1=0.24, 10=0.148, 100=0.0921, 500=0.06754, 1000=0.05958 (USD)", Reach SVHC Compliant=Yes, RoHS=Yes, RoHS Compliant=Yes, Stock=152644, Supplier=Digikey
R1 R2: library part CRCW080527R4FKEA, "RES SMD 27.4 OHM 1% 1/8W 0805", Case/Package=0805, Manufacturer=Vishay, Max Operating Temperature=155°C, Min Operating Temperature=-55°C, Package Height=0.45mm, Package Length=2mm, Package Shape=Rectangular, Package Width=1.25mm, Power=125mW, Rated Temperature=70°C, Resistor Type="FIXED RESISTOR", Supplier Part Number=541-27.4CCT-ND, Temperature Coefficient (ppm/Cel)=100, Tolerance=1%, Working Voltage=150V, Category="Chip SMD Resistors", ComponentLink1Description=https://datasheet.ciiva.com:443/pdfs/VipMasterIC/IC/VISH/VISH-S-A0007266705/VISH-S-A0007266705-1.pdf?src-supplier=IHS+Markit, ComponentLink1URL=https://datasheet.ciiva.com:443/pdfs/VipMasterIC/IC/VISH/VISH-S-A0007266705/VISH-S-A0007266705-1.pdf?src-supplier=IHS+Markit, ComponentLink2Description=https://datasheet.ciiva.com/11818/0900766b80d98b26-11818212.pdf?src-supplier=Rs, ComponentLink2URL=https://datasheet.ciiva.com/11818/0900766b80d98b26-11818212.pdf?src-supplier=Rs, ComponentLink3Description=https://datasheet.ciiva.com/22708/1697337-22708364.pdf?src-supplier=Element14, ComponentLink3URL=https://datasheet.ciiva.com/22708/1697337-22708364.pdf?src-supplier=Element14, ComponentLink4Description=https://datasheet.ciiva.com/2525/dcrcwe3-2525740.pdf?src-supplier=Digikey, ComponentLink4URL=https://datasheet.ciiva.com/2525/dcrcwe3-2525740.pdf?src-supplier=Digikey, ComponentLink5Description=https://datasheet.ciiva.com/2525/dcrcwe3-2525741.pdf?src-supplier=Digikey, ComponentLink5URL=https://datasheet.ciiva.com/2525/dcrcwe3-2525741.pdf?src-supplier=Digikey, ComponentLink6Description=https://datasheet.ciiva.com/2525/dcrcwe3-2525742.pdf?src-supplier=Digikey, ComponentLink6URL=https://datasheet.ciiva.com/2525/dcrcwe3-2525742.pdf?src-supplier=Digikey, ComponentLink7Description=https://datasheet.ciiva.com/5547/dcrcwe3-109170-5547413.pdf?src-supplier=Mouser, ComponentLink7URL=https://datasheet.ciiva.com/5547/dcrcwe3-109170-5547413.pdf?src-supplier=Mouser, ComponentLink8Description=https://datasheet.ciiva.com/7725/125364-7725886.pdf?src-supplier=Element14, ComponentLink8URL=https://datasheet.ciiva.com/7725/125364-7725886.pdf?src-supplier=Element14, ComponentLink9Description=https://datasheet.ciiva.com/7732/1697337-7732095.pdf?src-supplier=Element14, ComponentLink9URL=https://datasheet.ciiva.com/7732/1697337-7732095.pdf?src-supplier=Element14, ComponentLink10Description=https://datasheet.ciiva.com/16435/dcrcw-16435916.pdf?src-supplier=Future+Electronics, ComponentLink10URL=https://datasheet.ciiva.com/16435/dcrcw-16435916.pdf?src-supplier=Future+Electronics, Construction=Chip, JESD-609 Code=e3, Manufacturer Part Number=CRCW080527R4FKEA, Mounting Technology="Surface Mount", Packaging="Tape and Reel", Pins=2, Pricing="1=0.1, 10=0.039, 50=0.0248, 100=0.0208, 500=0.0143, 1000=0.01238 (USD)", Reach SVHC Compliant=Yes, Reference Standard=AEC-Q200, RoHS=Yes, RoHS Compliant=Yes, Stock=71015, Supplier=Digikey, Technology="METAL GLAZE/THICK FILM", Terminal Finish=Nickel, Termination=Wraparound
R3 R11 R12 R15 R16: library part CR0805AJ/-000EAS, "0 Ohms Jumper Chip Resistor 0805 (2012 Metric) Anti-Sulfur, Automotive AEC-Q200, Moisture Resistant Thick Film", Manufacturer=Bourns, Supplier Part Number=CR0805AJ/-000EASCT-ND, Category="Chip SMD Resistors", ComponentLink1Description=https://datasheet.ciiva.com:443/pdfs/VipMasterIC/IC/BOUR/BOUR-S-A0008933277/BOUR-S-A0008933277-1.pdf?src-supplier=IHS+Markit, ComponentLink1URL=https://datasheet.ciiva.com:443/pdfs/VipMasterIC/IC/BOUR/BOUR-S-A0008933277/BOUR-S-A0008933277-1.pdf?src-supplier=IHS+Markit, ComponentLink2Description=https://www.bourns.com/docs/product-datasheets/crxxxxa-as.pdf?src-supplier=Digikey, ComponentLink2URL=https://www.bourns.com/docs/product-datasheets/crxxxxa-as.pdf?src-supplier=Digikey, ComponentLink3Description=https://datasheet.octopart.com/CR0805AJ--000EAS-Bourns-datasheet-166097895.pdf?src-supplier=Electro+Sonic, ComponentLink3URL=https://datasheet.octopart.com/CR0805AJ--000EAS-Bourns-datasheet-166097895.pdf?src-supplier=Electro+Sonic, Manufacturer Part Number=CR0805AJ/-000EAS, Pricing="1=0.1, 10=0.034, 50=0.0212, 100=0.0177, 500=0.01208, 1000=0.01043 (USD)", RoHS=Yes, Stock=34544, Supplier=Digikey
R4 R5 R6 R7 R8: library part RC0805JR-075K1L, "RES 5.1K OHM 5% 1/8W 0805", Case/Package=0805, Manufacturer=Yageo, Max Operating Temperature=155°C, Min Operating Temperature=-55°C, Package Height=0.5mm, Package Length=2mm, Package Shape=Rectangular, Package Width=1.25mm, Power=125mW, Rated Temperature=70°C, Resistor Type="FIXED RESISTOR", Supplier Part Number=311-5.1KARCT-ND, Temperature Coefficient (ppm/Cel)=100, Tolerance=5%, Working Voltage=150V, Additional Feature="LASER TRIMMABLE", Category="Chip SMD Resistors", ComponentLink1Description=https://datasheet.ciiva.com:443/pdfs/VipMasterIC/IC/YAGO/YAGO-S-A0008145938/YAGO-S-A0008145938-1.pdf?src-supplier=IHS+Markit, ComponentLink1URL=https://datasheet.ciiva.com:443/pdfs/VipMasterIC/IC/YAGO/YAGO-S-A0008145938/YAGO-S-A0008145938-1.pdf?src-supplier=IHS+Markit, ComponentLink2Description=https://datasheet.ciiva.com/2456/pyu-r-int-thick-7-2456155.pdf?src-supplier=Digikey, ComponentLink2URL=https://datasheet.ciiva.com/2456/pyu-r-int-thick-7-2456155.pdf?src-supplier=Digikey, ComponentLink3Description=https://datasheet.ciiva.com/2456/pyu-r-int-thick-7-2456156.pdf?src-supplier=Digikey, ComponentLink3URL=https://datasheet.ciiva.com/2456/pyu-r-int-thick-7-2456156.pdf?src-supplier=Digikey, ComponentLink4Description=https://datasheet.ciiva.com/2456/pyu-r-int-thick-7-2456157.pdf?src-supplier=Digikey, ComponentLink4URL=https://datasheet.ciiva.com/2456/pyu-r-int-thick-7-2456157.pdf?src-supplier=Digikey, ComponentLink5Description=https://datasheet.ciiva.com/12577/rc0805-12577711.pdf?src-supplier=Mouser, ComponentLink5URL=https://datasheet.ciiva.com/12577/rc0805-12577711.pdf?src-supplier=Mouser, Construction=Chip, JESD-609 Code=e3, Manufacturer Part Number=RC0805JR-075K1L, Mounting Technology="Surface Mount", Packaging="Tape and Reel", Pins=2, Pricing="1=0.1, 10=0.008, 50=0.0072, 100=0.0061 (USD)", Reach SVHC Compliant=Yes, RoHS=Yes, RoHS Compliant=Yes, Stock=555886, Supplier=Digikey, Technology="METAL GLAZE/THICK FILM", Terminal Finish=Nickel, Termination=Wraparound
R9 R10 R13 R17 R18 R19 R20: library part RMCF0805FT10K0, "Fixed Resistor, Metal Glaze/thick Film, 0.125W, 10000ohm, 150V, 1% +/-Tol, 100ppm/Cel, Surface Mount, 0805", Manufacturer 1="Stackpole Electronics", Max Operating Temperature=155°C, Min Operating Temperature=-55°C, Package Height=0.5mm, Package Length=2mm, Package Shape=Rectangular, Package Width=1.25mm, Rated Power Dissipation (P)=125mW, Rated Temperature=70°C, Resistance=10kR, Resistor Type="FIXED RESISTOR", Temperature Coefficient (ppm/Cel)=100, Tolerance=1%, Working Voltage=150V, Category="Chip SMD Resistors", ComponentLink1Description=https://datasheet.ciiva.com:443/pdfs/VipMasterIC/IC/SEIE/SEIE-S-A0009541969/SEIE-S-A0009541969-1.pdf?src-supplier=IHS+Markit, ComponentLink1URL=https://datasheet.ciiva.com:443/pdfs/VipMasterIC/IC/SEIE/SEIE-S-A0009541969/SEIE-S-A0009541969-1.pdf?src-supplier=IHS+Markit, ComponentLink2Description=https://datasheet.ciiva.com/15193/getdatasheetpartid-362046-15193525.pdf?src-supplier=Verical, ComponentLink2URL=https://datasheet.ciiva.com/15193/getdatasheetpartid-362046-15193525.pdf?src-supplier=Verical, Construction=Rectangular, JESD-609 Code=e3, Manufacturer Part Number 1=RMCF0805FT10K0, Mount="Surface Mount", Number of Pins=2, Packaging="Tape and Reel", Pricing 1="1=0.1, 10=0.025, 100=0.012, 1000=0.00658, 2500=0.00564 (USD)", Reach SVHC Compliant=Yes, Reference Standard=AEC-Q200, RoHS=Yes, RoHS Compliant=Yes, Size Code=0805, Stock 1=928178, Supplier 1=Digikey, Technology="METAL GLAZE/THICK FILM", Terminal Finish=Nickel, Termination=Wraparound
R14 R21: library part RC0805FR-071KL, "RES 1K OHM 1% 1/8W 0805", Case/Package=0805, Manufacturer=Yageo, Max Operating Temperature=155°C, Min Operating Temperature=-55°C, Package Height=0.5mm, Package Length=2mm, Package Shape=Rectangular, Package Width=1.25mm, Power=125mW, Rated Temperature=70°C, Resistor Type="FIXED RESISTOR", Supplier Part Number=311-1.00KCRCT-ND, Temperature Coefficient (ppm/Cel)=100, Tolerance=1%, Working Voltage=150V, Additional Feature="LASER TRIMMABLE", Category="Chip SMD Resistors", ComponentLink1Description=https://datasheet.ciiva.com:443/pdfs/VipMasterIC/IC/YAGO/YAGO-S-A0008145938/YAGO-S-A0008145938-1.pdf?src-supplier=IHS+Markit, ComponentLink1URL=https://datasheet.ciiva.com:443/pdfs/VipMasterIC/IC/YAGO/YAGO-S-A0008145938/YAGO-S-A0008145938-1.pdf?src-supplier=IHS+Markit, Construction=Chip, JESD-609 Code=e3, Manufacturer Part Number=RC0805FR-071KL, Mounting Technology="Surface Mount", Packaging="Tape and Reel", Pins=2, Pricing="1=0.1, 10=0.012, 100=0.0092, 1000=0.00714, 5000=0.00408, 10000=0.00396, 15000=0.00374, 25000=0.00356 (USD)", Reach SVHC Compliant=Yes, RoHS=Yes, RoHS Compliant=Yes, Stock=932567, Supplier=Digikey, Technology="METAL GLAZE/THICK FILM", Terminal Finish=Nickel, Termination=Wraparound
R22: library part CRCW08052K00FKEA, "Fixed Resistor, Metal Glaze/thick Film, 0.125W, 2000ohm, 150V, 1% +/-Tol, 100ppm/Cel, Surface Mount, 0805", Case/Package=0805, Manufacturer=Vishay, Max Operating Temperature=155°C, Min Operating Temperature=-55°C, Package Height=0.45mm, Package Length=2mm, Package Shape=Rectangular, Package Width=1.25mm, Power=125mW, Rated Temperature=70°C, Resistor Type="FIXED RESISTOR", Supplier Part Number=541-2.00KCCT-ND, Temperature Coefficient (ppm/Cel)=100, Tolerance=1%, Working Voltage=150V, Category="Chip SMD Resistors", ComponentLink1Description=https://datasheet.ciiva.com:443/pdfs/VipMasterIC/IC/VISH/VISH-S-A0007266705/VISH-S-A0007266705-1.pdf?src-supplier=IHS+Markit, ComponentLink1URL=https://datasheet.ciiva.com:443/pdfs/VipMasterIC/IC/VISH/VISH-S-A0007266705/VISH-S-A0007266705-1.pdf?src-supplier=IHS+Markit, ComponentLink2Description=https://datasheet.ciiva.com/9093/dcrcwe3-9093501.pdf?src-supplier=Avnet, ComponentLink2URL=https://datasheet.ciiva.com/9093/dcrcwe3-9093501.pdf?src-supplier=Avnet, ComponentLink3Description=https://datasheet.ciiva.com/2467/dcrcwe3-2467164.pdf?src-supplier=Digikey, ComponentLink3URL=https://datasheet.ciiva.com/2467/dcrcwe3-2467164.pdf?src-supplier=Digikey, ComponentLink4Description=https://datasheet.ciiva.com/2467/dcrcwe3-2467165.pdf?src-supplier=Digikey, ComponentLink4URL=https://datasheet.ciiva.com/2467/dcrcwe3-2467165.pdf?src-supplier=Digikey, ComponentLink5Description=https://datasheet.ciiva.com/2467/dcrcwe3-2467166.pdf?src-supplier=Digikey, ComponentLink5URL=https://datasheet.ciiva.com/2467/dcrcwe3-2467166.pdf?src-supplier=Digikey, ComponentLink6Description=https://datasheet.ciiva.com/16772/70201119-16772086.pdf?src-supplier=Allied+Electronics, ComponentLink6URL=https://datasheet.ciiva.com/16772/70201119-16772086.pdf?src-supplier=Allied+Electronics, ComponentLink7Description=https://datasheet.ciiva.com/16199/dcrcwe3-16199147.pdf?src-supplier=Future+Electronics, ComponentLink7URL=https://datasheet.ciiva.com/16199/dcrcwe3-16199147.pdf?src-supplier=Future+Electronics, ComponentLink8Description=https://datasheet.ciiva.com/5547/dcrcwe3-109170-5547611.pdf?src-supplier=Mouser, ComponentLink8URL=https://datasheet.ciiva.com/5547/dcrcwe3-109170-5547611.pdf?src-supplier=Mouser, ComponentLink9Description=https://datasheet.ciiva.com/15158/getdatasheetpartid-246953-15158870.pdf?src-supplier=Verical, ComponentLink9URL=https://datasheet.ciiva.com/15158/getdatasheetpartid-246953-15158870.pdf?src-supplier=Verical, ComponentLink10Description=https://datasheet.ciiva.com/7673/1697337-7673343.pdf?src-supplier=Element14, ComponentLink10URL=https://datasheet.ciiva.com/7673/1697337-7673343.pdf?src-supplier=Element14, ComponentLink11Description=https://datasheet.ciiva.com/7673/1720486-7673482.pdf?src-supplier=Element14, ComponentLink11URL=https://datasheet.ciiva.com/7673/1720486-7673482.pdf?src-supplier=Element14, ComponentLink12Description=https://datasheet.ciiva.com/7673/1720486-7673483.pdf?src-supplier=Element14, ComponentLink12URL=https://datasheet.ciiva.com/7673/1720486-7673483.pdf?src-supplier=Element14, Construction=Chip, JESD-609 Code=e3, Manufacturer Part Number=CRCW08052K00FKEA, Mounting Technology="Surface Mount", Packaging="Tape and Reel", Pins=2, Pricing="1=0.1, 10=0.042, 100=0.0217, 1000=0.01279, 2500=0.0108 (USD)", Reach SVHC Compliant=Yes, Reference Standard=AEC-Q200, RoHS=Yes, RoHS Compliant=Yes, Stock=21507, Supplier=Digikey, Technology="METAL GLAZE/THICK FILM", Terminal Finish=Nickel, Termination=Wraparound
SW1 SW2 SW3 SW4 SW5 SW6: "Tactile Switch SPST-NO Top Actuated Surface Mount", Contact Current(DC)-Max=50mA, Contact DC Max Rating R Load=0.05A@12VDC, Contact Resistance=0.1mR, Contact Voltage(DC)-Max=12V, Dielectric Withstand Volts=250VACV, Insulation Resistance=100GR, Manufacturer 1="ITT C&K", Manufacturer Part Number 1=PTS645SM43SMTR92LFS, Max Operating Temperature=60°C, Min Operating Temperature=-20°C, Supplier Part Number 1=CKN9085CT-ND, Actuator Type=Pushbutton, Body Breadth=5.9944mm, Body Height=3.4544mm, Body Length or Diameter=5.9944mm, Category="Tactile Switches", ComponentLink1Description=https://datasheet.ciiva.com:443/pdfs/VipMasterIC/IC/CKCI/CKCI-S-A0001796527/CKCI-S-A0001796842-1.pdf?src-supplier=IHS+Markit, ComponentLink1URL=https://datasheet.ciiva.com:443/pdfs/VipMasterIC/IC/CKCI/CKCI-S-A0001796527/CKCI-S-A0001796842-1.pdf?src-supplier=IHS+Markit, ComponentLink2Description=https://datasheet.ciiva.com/29903/getdatasheetpartid-786341-29903846.pdf?src-supplier=Verical, ComponentLink2URL=https://datasheet.ciiva.com/29903/getdatasheetpartid-786341-29903846.pdf?src-supplier=Verical, ComponentLink3Description=https://datasheet.ciiva.com/29931/getdatasheetpartid-764615-29931183.pdf?src-supplier=Verical, ComponentLink3URL=https://datasheet.ciiva.com/29931/getdatasheetpartid-764615-29931183.pdf?src-supplier=Verical, ComponentLink4Description=https://datasheet.ciiva.com/14920/pts645-14920733.pdf?src-supplier=Digikey, ComponentLink4URL=https://datasheet.ciiva.com/14920/pts645-14920733.pdf?src-supplier=Digikey, ComponentLink5Description=https://datasheet.ciiva.com/14920/pts645-14920734.pdf?src-supplier=Digikey, ComponentLink5URL=https://datasheet.ciiva.com/14920/pts645-14920734.pdf?src-supplier=Digikey, ComponentLink6Description=https://datasheet.ciiva.com/14920/pts645-14920735.pdf?src-supplier=Digikey, ComponentLink6URL=https://datasheet.ciiva.com/14920/pts645-14920735.pdf?src-supplier=Digikey, JESD-609 Code=e4, Mount="Surface Mount", PCB Hole Count=4, Pricing 1="1=0.37, 10=0.299, 25=0.2756, 100=0.243, 250=0.22348, 500=0.2096 (USD)", Reach SVHC Compliant=Yes, RoHS=Yes, RoHS Compliant=Yes, Stock 1=178618, Supplier 1=Digikey, Switch Action=MOMENTARY, Switch Function=SPST, Switch Type=Keypad, Terminal Finish=Silver, Terminal Length=0.138inch, Termination=Solder
U1: "RF TXRX MOD BT WIFI PCB TH SMD", Manufacturer="Espressif Systems", Supplier Part Number=1965-ESP32-S3-WROOM-1-N16R8CT-ND, Category=LDO, ComponentLink1Description=https://datasheet.octopart.com/ESP32-S3-WROOM-1-N16R8-Espressif-Systems-datasheet-165560563.pdf?src-supplier=TME, ComponentLink1URL=https://datasheet.octopart.com/ESP32-S3-WROOM-1-N16R8-Espressif-Systems-datasheet-165560563.pdf?src-supplier=TME, Manufacturer Part Number=ESP32-S3-WROOM-1(N16R8), Pricing="1=3.9, 650=3.90002 (USD)", RoHS=No, Stock=2632, Supplier=Digikey